# Altium PCB PCB2.PcbDoc
Units mm, origin at the board's own origin, x right, y up, seen from the top; angles counter-clockwise.
Board outline 67.18 x 97.54 mm, 2 copper layers (Top Layer, Bottom Layer); 14 components, 39 nets, 84 pads, 0 vias.
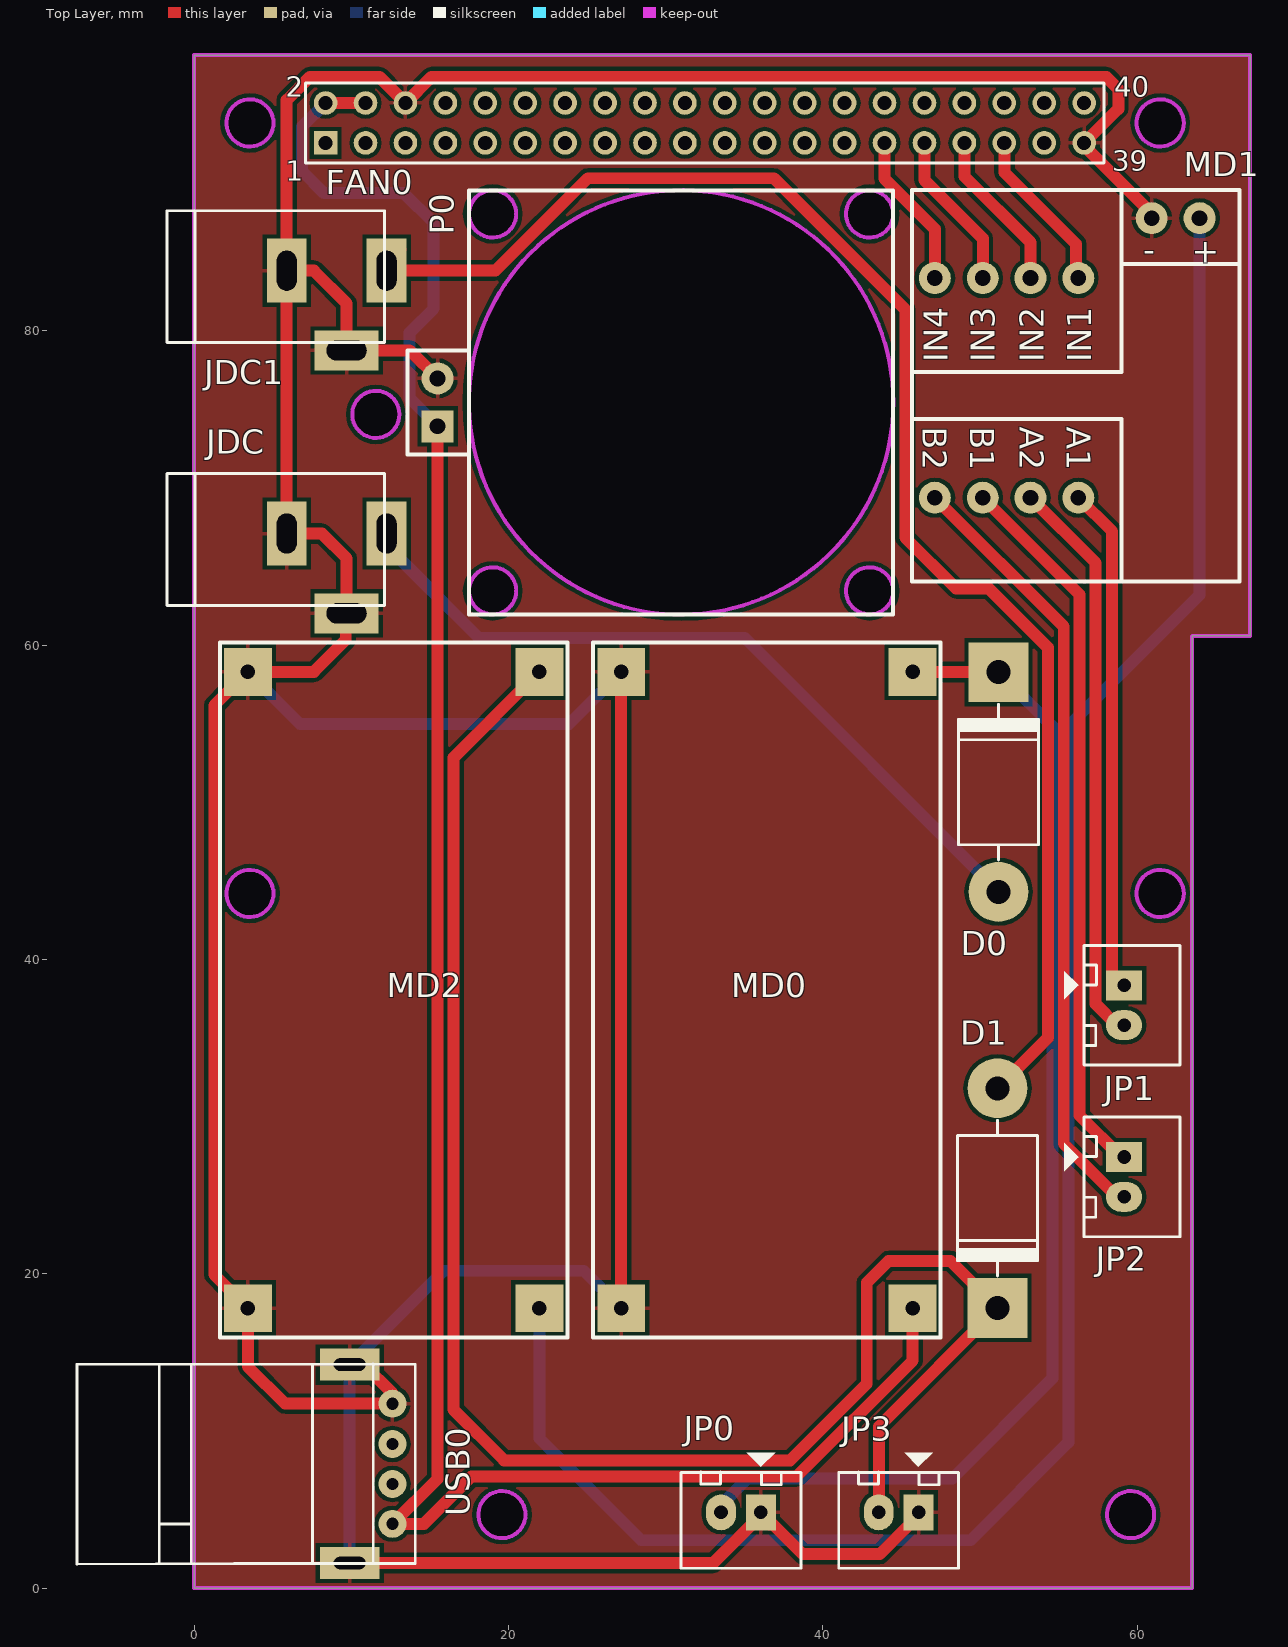
[diagram p0: Top Layer view]
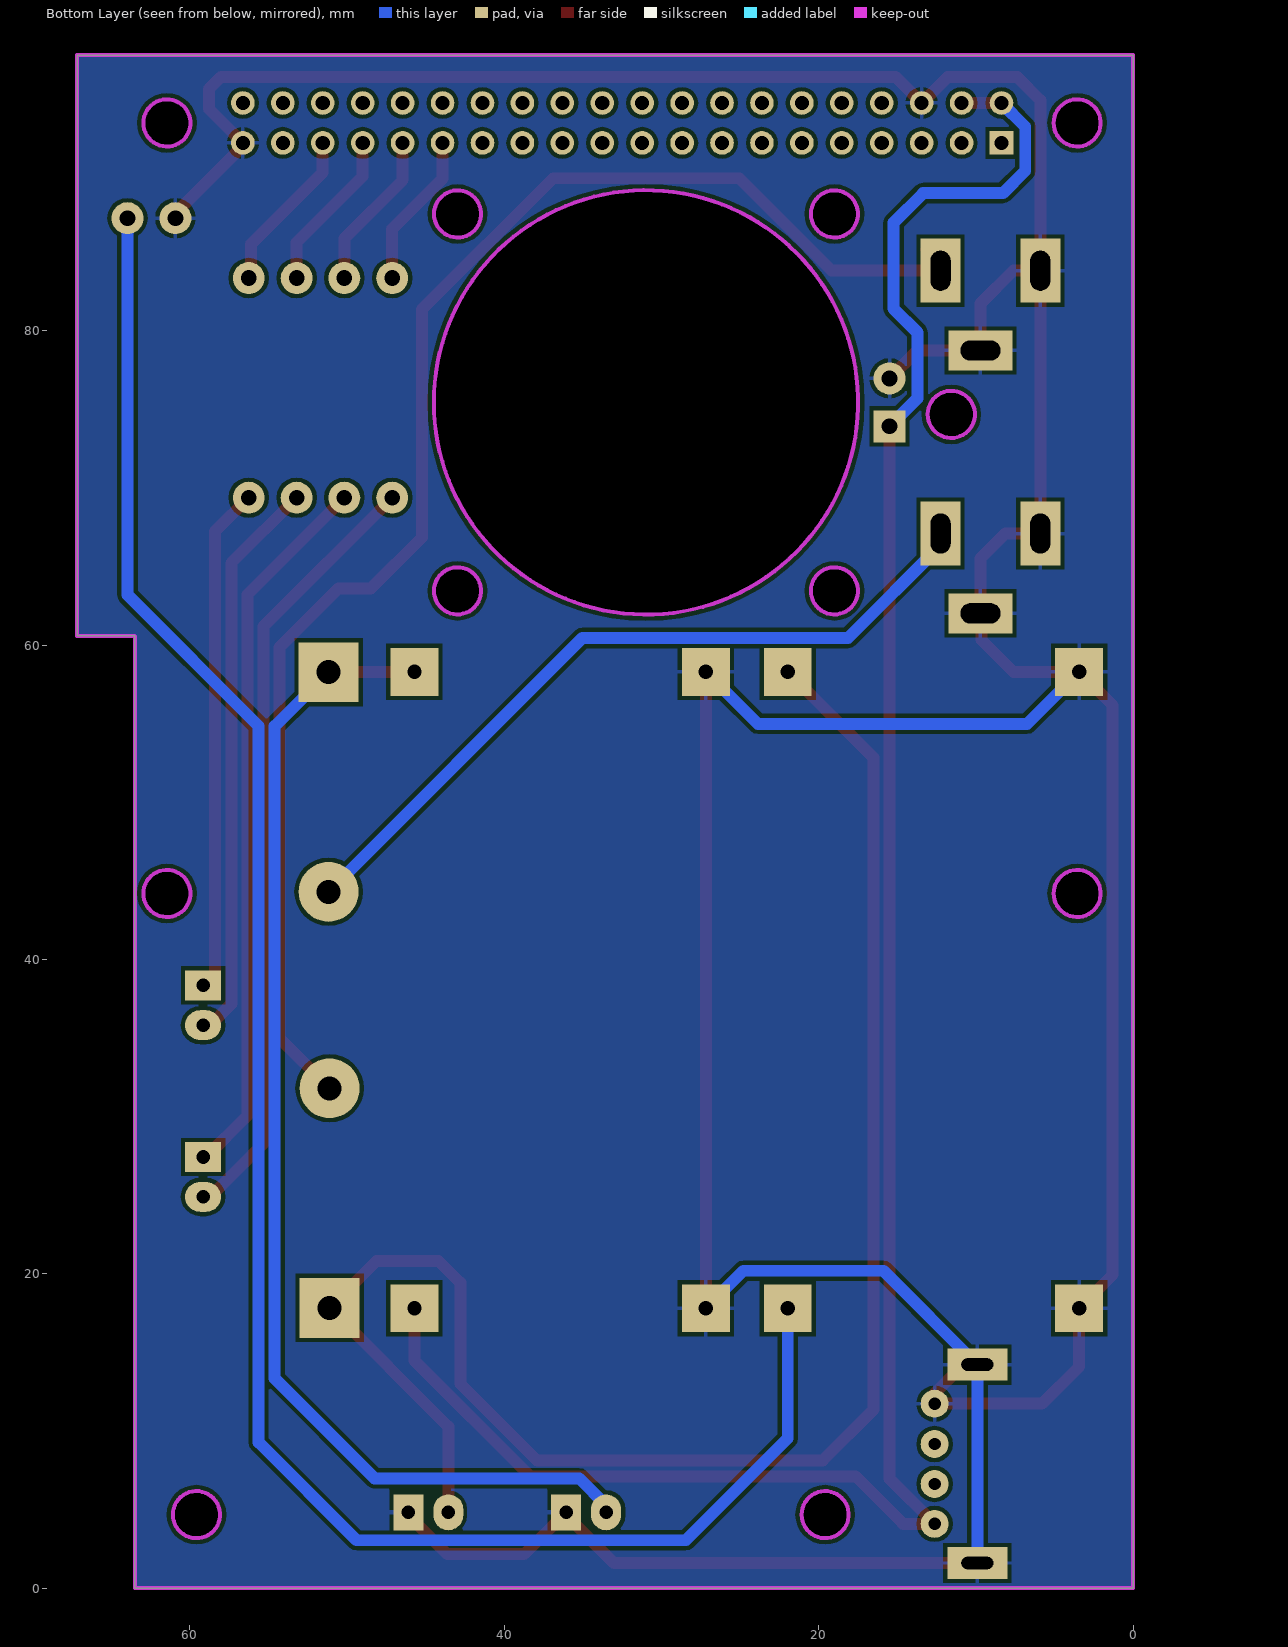
[diagram p1: Bottom Layer view, seen from below]
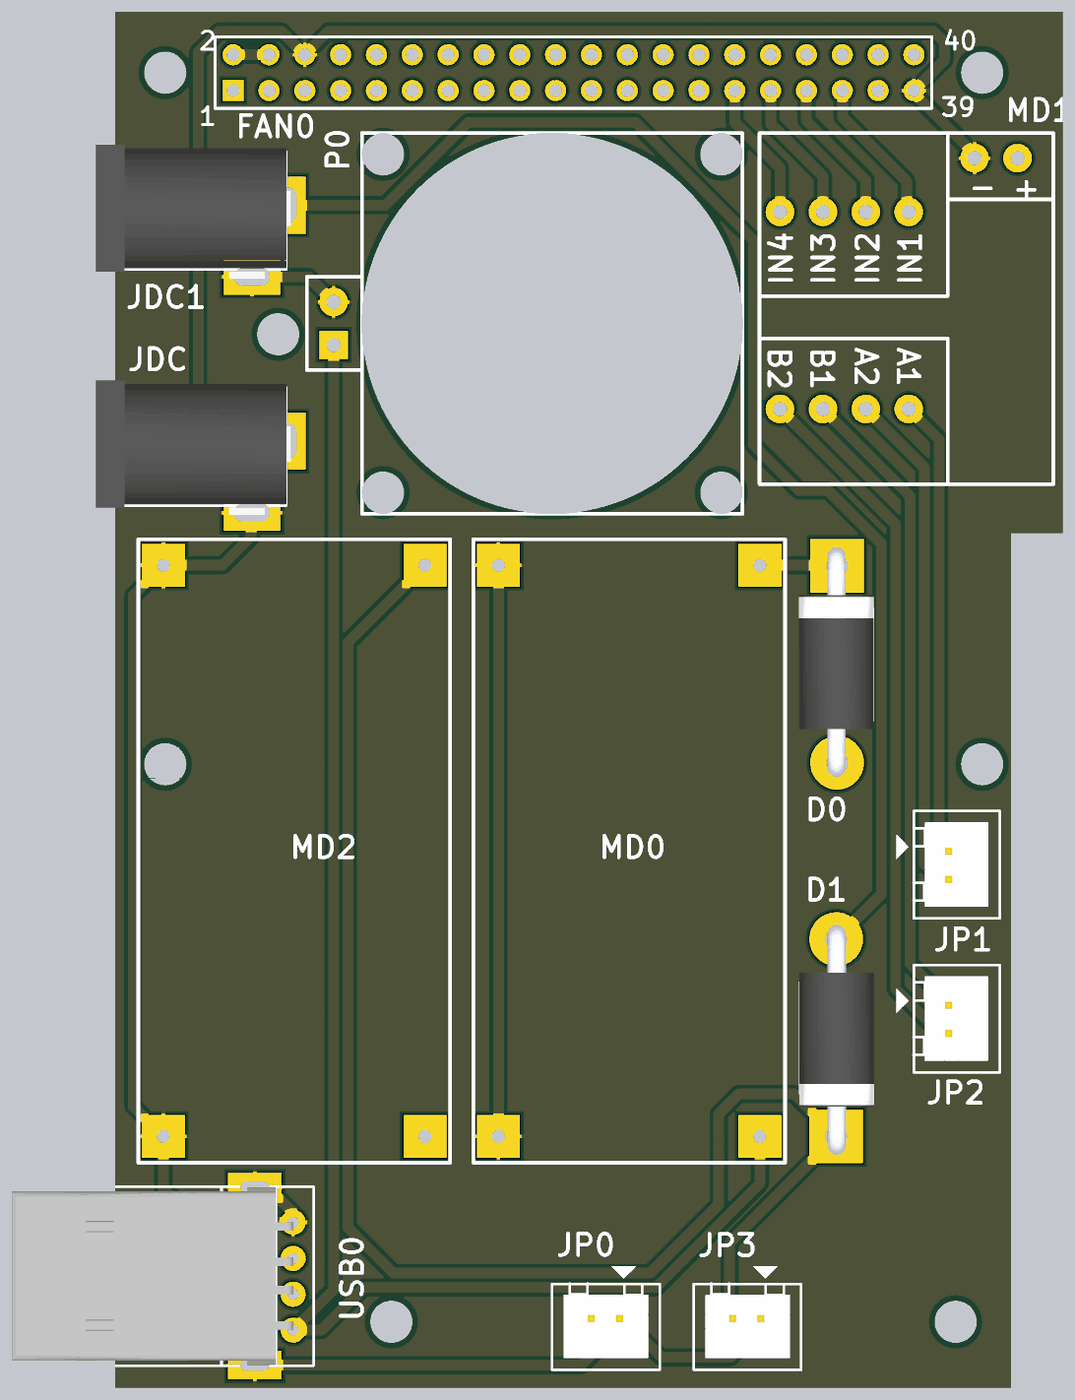
[diagram p2: 3D render of the assembled board from above, using the file's embedded part models]

## Layer stack, top to bottom
Top Solder: solder mask 0.0102, Solder Resist, Dk 3.5
Top Layer: signal copper 0.0356
Dielectric 1: dielectric 0.32, FR-4, Dk 4.8
Bottom Layer: signal copper 0.0356
Bottom Solder: solder mask 0.0102, Solder Resist, Dk 3.5

## Board outline
0,0 0,97.536 67.183,97.536 67.183,60.579 63.5,60.579 63.5,0
cut-out: 17.487,75.438 ccw(c30.987,75.438) 30.987,61.938 ccw(c30.987,75.438) 44.486,75.438 ccw(c30.987,75.438) 30.987,88.938 ccw(c30.987,75.438)
cut-out: 17.499,63.449 ccw(c18.999,63.449) 18.999,61.949 ccw(c18.999,63.449) 20.499,63.449 ccw(c18.999,63.449) 18.999,64.949 ccw(c18.999,63.449)
cut-out: 41.477,63.449 ccw(c42.977,63.449) 42.977,61.949 ccw(c42.977,63.449) 44.477,63.449 ccw(c42.977,63.449) 42.977,64.949 ccw(c42.977,63.449)
cut-out: 41.477,87.427 ccw(c42.977,87.427) 42.977,85.927 ccw(c42.977,87.427) 44.477,87.427 ccw(c42.977,87.427) 42.977,88.927 ccw(c42.977,87.427)
cut-out: 17.499,87.427 ccw(c18.999,87.427) 18.999,85.927 ccw(c18.999,87.427) 20.499,87.427 ccw(c18.999,87.427) 18.999,88.927 ccw(c18.999,87.427)
cut-out: 10.064,74.676 ccw(c11.564,74.676) 11.564,73.176 ccw(c11.564,74.676) 13.064,74.676 ccw(c11.564,74.676) 11.564,76.176 ccw(c11.564,74.676)
cut-out: 18.087,4.676 ccw(c19.587,4.676) 19.587,3.176 ccw(c19.587,4.676) 21.087,4.676 ccw(c19.587,4.676) 19.587,6.176 ccw(c19.587,4.676)
cut-out: 58.087,4.676 ccw(c59.587,4.676) 59.587,3.176 ccw(c59.587,4.676) 61.087,4.676 ccw(c59.587,4.676) 59.587,6.176 ccw(c59.587,4.676)
cut-out: 61.468,91.718 cw(c61.468,93.218) 59.968,93.218 cw(c61.468,93.218) 61.468,94.718 cw(c61.468,93.218) 62.968,93.218 cw(c61.468,93.218)
cut-out: 3.556,91.718 cw(c3.556,93.218) 2.056,93.218 cw(c3.556,93.218) 3.556,94.718 cw(c3.556,93.218) 5.056,93.218 cw(c3.556,93.218)
cut-out: 3.556,42.696 cw(c3.556,44.196) 2.056,44.196 cw(c3.556,44.196) 3.556,45.696 cw(c3.556,44.196) 5.056,44.196 cw(c3.556,44.196)
cut-out: 3.556,42.696 cw(c3.556,44.196) 2.056,44.196 cw(c3.556,44.196) 3.556,45.696 cw(c3.556,44.196) 5.056,44.196 cw(c3.556,44.196)
cut-out: 59.968,44.196 ccw(c61.468,44.196) 61.468,42.696 ccw(c61.468,44.196) 62.968,44.196 ccw(c61.468,44.196) 61.468,45.696 ccw(c61.468,44.196)

## Design rules (kind name [scope] priority, off if disabled: settings)
Clearance [All] p1: gap=0.254 ignorepadtopadclearanceinfootprint=FALSE except(0: Arc-Hole Track-Hole SMDPad-Hole THPad-Hole Via-Hole Fill-Hole Poly-Hole Region-Hole Text-Hole)
PolygonConnect [All] p1: connectstyle=Relief reliefconductorwidth=0.254 reliefentries=4 polygonreliefangle="90 Angle" airgapwidth=0.254
RoutingVias [All] p1: holewidth=0.711 width=1.27 viastyle="Through Hole" minholewidth=0.711 minwidth=1.27 maxholewidth=0.711 maxwidth=1.27
SolderMaskExpansion [All] p1: expansion=0.102
Width [All] p1: maxlimit=0.762 minlimit=0.254 preferedwidth=0.762
30 further rules are at their usual default settings.

## Components (designator, comment, footprint, x,y, rotation, side; value= is the part's Value field where it differs from the comment)
D0 "1N5408" D5A 51.181,58.272 r270 top
D1 "1N5408" D5A 51.117,17.831 r90 top
FAN0 "24*24mm" "FAN DC" 50.749,88.722 r180 top
JDC "Jac DC" DC-IN 9.073,64.556 r0 top
JDC1 "Jac DC" DC-IN 9.073,81.28 r0 top
JP0 "TEST BATTERY" CON2 36.068,4.826 r180 top value="Connector 2"
JP1 "MOTORA" CON2 59.167,38.354 r270 top value="Connector 2"
JP2 "MOTORb" CON2 59.167,27.432 r270 top value="Connector 2"
JP3 "TEST BATTERY" CON2 46.103,4.826 r180 top value="Connector 2"
MD0 "Adjust Voltage (5A)" XL4005 25.398,60.151 r270 top
MD1 "H BRIDGE MINI" "H BRIDGE MINI" 45.685,64.044 r0 top
MD2 "ADJ" LM2596-ADJ 1.649,60.151 r270 top
P0 "Header 20X2" HDR2X20 8.37,91.948 r0 top
USB0 "USB-S" USB-A 12.624,4.089 r90 top value=USB

## Footprints (in the part's own frame and the unit in brackets; to place one, negate y for a bottom-side part, rotate by r counter-clockwise, add the part's x,y. Pads: shape width x height; smd on the part's side, far side on the other; paste and mask are expansions set on the pad)
CON2 [mil] "CON2"
  rect 75x90 hole 34: 1(0,0)
  oval 75x90 hole 34: 2(100,0)
  silkscreen extent -100,-150 200,140, body extent -68,-70 168,107, height 236
D5A [mil] "Diode 5A, W 200mil, L 550mil"
  round 150 hole 60: 1(550,0)
  rect 150x150 hole 60: 2(0,0)
  silkscreen extent 80,-100 470,100, body extent -52,-106 590,103, height 254
DC-IN [mil] "Jac DC input"
  rect 100x160 hole 50 slot 100 at 90 deg: 1(125,100) 2(-125,100)
  rect 160x100 hole 50 slot 100 at 0 deg: 3(25,-100)
  silkscreen extent -425,-80 120,250, body extent -410,-105 134,269, height 434
"FAN DC" [mil] "24*24mm"
  round 80 hole 39.37: GND(1388,463)
  rect 80x80 hole 39.37: VCC(1388,583)
  Keep-Out Layer circle w10: c778,523 r531.43
  Keep-Out Layer circle w10: c1250,51 r59.06
  Keep-Out Layer circle w10: c306,51 r59.06
  Keep-Out Layer circle w10: c306,995 r59.06
  Keep-Out Layer circle w10: c1250,995 r59.06
  silkscreen extent 120,-8 1463,1054
"H BRIDGE MINI" [mil] "MX1508"
  round 80 hole 39.37: 0(720,910) 1(600,910) 2(416.37,760) 3(296.37,760) 4(177,760) 5(57,760) 6(416.37,210) 7(296.37,210) 8(177,210) 9(57,210)
  silkscreen extent 0,0 820,980
HDR2X20 [mm] "Connector; Header; 20x2 Position"
  rect 1.5x1.5 hole 0.9: 1(0,0)
  round 1.5 hole 0.9: 2(0,2.54) 3(2.54,0) 4(2.54,2.54) 5(5.08,0) 6(5.08,2.54) 7(7.62,0) 8(7.62,2.54) 9(10.16,0) 10(10.16,2.54) 11(12.7,0) 12(12.7,2.54) 13(15.24,0) 14(15.24,2.54) 15(17.78,0) 16(17.78,2.54) 17(20.32,0) 18(20.32,2.54) 19(22.86,0) 20(22.86,2.54) 21(25.4,0) 22(25.4,2.54) 23(27.94,0) 24(27.94,2.54) 25(30.48,0) 26(30.48,2.54) 27(33.02,0) 28(33.02,2.54) 29(35.56,0) 30(35.56,2.54) 31(38.1,0) 32(38.1,2.54) 33(40.64,0) 34(40.64,2.54) 35(43.18,0) 36(43.18,2.54) 37(45.72,0) 38(45.72,2.54) 39(48.26,0) 40(48.26,2.54)
  silkscreen extent -1.27,-1.27 49.53,3.81
LM2596-ADJ [mil] "Module"
  rect 120x120 hole 35.98: 0(73,800) 1(73,70.08) 2(1667,800) 3(1667,70.08)
  silkscreen extent 0,0 1740,870
USB-A [mil]
  round 70 hole 31: 1(0,0) 2(100,0) 3(200,0) 4(301,0)
  rect 80x150 hole 31 slot 80 at 90 deg: 5(-98,107) 6(399,107)
  silkscreen extent -101,-57 401,790, body extent -97,0 399,784, height 177
XL4005 [mil] "Adjust Voltage (5A)"
  rect 120x120 hole 35.98: 0(73,800) 1(73,70.08) 2(1667,800) 3(1667,70.08)
  silkscreen extent 0,0 1740,870

## Part data
D0 D1: library part D5A, "Diode 5A"
FAN0: library part "FAN 24*24mm"
JDC JDC1: library part DCIN, "Jac DC input"
JP0 JP1 JP2 JP3: library part Con2, "Connector 2"
MD0: library part XL4005
MD1: "MX1508"
MD2: library part LM2596, "Manage voltage"
P0: "Header, 20-Pin, Dual row", LatestRevisionDate=17-Jul-2002, LatestRevisionNote="Re-released for DXP Platform.", Publisher="Altium Limited"
USB0: library part USB_S, "USB connector"

## Nets (pads, with @x,y where several pads share a name; then routed paths per layer and width w, separated by ;. In a path a pad name is that pad's centre, name@x,y a point inside that pad or via, vN(x,y) a via of type N, cw(c..) or ccw(c..) an arc to the next point about the centre after c; other vN are vias at no path point)
+12: D0.2 JP0.2 MD0.0 | length 76.7
  Top Layer w0.762: MD0.0 51.156,58.297 D0.2
  Bottom Layer w0.762: JP0.2 33.528,5.28 35.233,6.985 48.26,6.985 54.61,13.335 54.61,54.843 D0.2
+12_1: D1.2 JP3.2 MD2.0 | length 111.6
  Top Layer w0.762: MD2.0 16.51,52.838 16.51,11.353 19.735,8.128 37.931,8.128 42.799,12.996 42.799,19.431 44.196,20.828 48.12,20.828 D1.2 43.563,10.276 JP3.2
GND: FAN0.GND JDC1.2 JDC1.3 JDC.2 JDC.3 JP0.1 JP3.1 MD0.1 MD0.3 MD1.1 MD2.1 MD2.3 P0.6 P0.39 USB0.4 USB0.5 USB0.6 | length 325.1
  Top Layer w0.762: USB0.5 33.033,1.6 JP0.1@36.068,4.635 ; USB0.6 10.795,14.224 12.624,12.395 USB0.4 5.791,11.735 3.429,14.097 MD2.3 1.294,19.944 1.294,56.162 MD2.1 7.62,58.297 9.652,60.329 9.652,61.96 JDC.3 9.708,65.516 8.128,67.096 JDC.2 JDC1.2 ; FAN0.GND 13.716,78.74 JDC1.3 9.708,81.732 7.62,83.82 JDC1.2 ; MD0.3 MD0.1 ; JP0.1 JP0.1@36.068,4.635 ; JP3.1 46.103,4.635 43.626,2.159 38.735,2.159 36.83,4.064 36.639,4.064 JP0.1@36.068,4.635 ; MD1.1 60.925,87.453 56.63,91.748 P0.39 58.801,94.119 58.801,95.377 58.039,96.139 15.101,96.139 P0.6 11.799,96.139 7.366,96.139 5.898,94.671 JDC1.2
  Bottom Layer w0.762: MD2.1 6.735,54.991 23.872,54.991 MD0.1 ; USB0.5 USB0.6 15.875,20.193 24.794,20.193 MD0.3
GPIO02: P0.3
GPIO03: P0.5
GPIO04: P0.7
GPIO05: MD1.5 P0.29 | length 9.9
  Top Layer w0.762: P0.29 43.93,89.673 47.133,86.47 MD1.5
GPIO06: MD1.4 P0.31 | length 10.1
  Top Layer w0.762: P0.31 46.47,89.576 50.181,85.865 MD1.4
GPIO07: P0.26
GPIO08: P0.24
GPIO09: P0.21
GPIO10: P0.19
GPIO11: P0.23
GPIO12: P0.32
GPIO13: MD1.3 P0.33 | length 10.3
  Top Layer w0.762: P0.33 49.01,89.822 53.213,85.619 MD1.3
GPIO14: P0.8
GPIO15: P0.10
GPIO16: P0.36
GPIO17: P0.11
GPIO18: P0.12
GPIO19: MD1.2 P0.35 | length 10.6
  Top Layer w0.762: P0.35 51.571,91.927 51.571,90.055 56.118,85.507 56.118,83.491 MD1.2
GPIO20: P0.38
GPIO21: P0.40
GPIO22: P0.15
GPIO23: P0.16
GPIO24: P0.18
GPIO25: P0.22
GPIO26: P0.37
GPIO27: P0.13
ID_SC: P0.28
ID_SD: P0.27
NetD0_1: D0.1 JDC.1 | length 48.8
  Bottom Layer w0.762: JDC.1 12.248,66.334 18.125,60.456 35.027,60.456 D0.1
NetD1_1: D1.1 JDC1.1 | length 96.4
  Top Layer w0.762: JDC1.1@13.137,85.165 12.248,84.276 JDC1.1 19.171,83.82 25.049,89.698 36.895,89.698 45.248,81.345 45.248,66.838 48.49,63.597 50.564,63.597 54.316,59.845 54.316,34.999 D1.1
NetJP1_1: JP1.1 MD1.6 | length 32.3
  Top Layer w0.762: MD1.6 58.405,67.234 58.405,38.925 58.977,38.354 JP1.1
NetJP1_2: JP1.2 MD1.7 | length 36.3
  Top Layer w0.762: MD1.7 57.364,65.227 57.364,37.164 58.714,35.814 JP1.2
NetJP2_1: JP2.1 MD1.8 | length 45.8
  Top Layer w0.762: MD1.8 56.348,63.211 56.348,30.061 58.977,27.432 JP2.1
NetJP2_2: JP2.2 MD1.9 | length 49.7
  Top Layer w0.762: MD1.9 55.332,61.179 55.332,28.274 58.714,24.892 JP2.2
VCC: FAN0.VCC MD0.2 P0.2 P0.4 USB0.1 | length 143.3
  Top Layer w0.762: P0.2 P0.4 ; FAN0.VCC 15.494,6.96 USB0.1 14.63,4.089 17.653,7.112 38.352,7.112 45.718,14.478 MD0.2
  Bottom Layer w0.762: P0.2 6.858,92.976 6.858,90.17 8.272,88.756 13.352,88.756 15.24,86.868 15.24,81.407 13.716,79.883 13.716,75.692 FAN0.VCC
VCC_1: MD1.0 MD2.2 | length 128.5
  Bottom Layer w0.762: MD2.2 21.969,9.527 28.448,3.048 49.403,3.048 55.626,9.271 55.626,54.841 63.973,63.188 MD1.0
pads on no net: P0.1 P0.9 P0.14 P0.17 P0.20 P0.25 P0.30 P0.34 USB0.2 USB0.3

## Polygon pours and split planes (outlines as drawn)
GND on Bottom Layer "Bottom Layer-GND 1" (solid, pour order 48): 0,97.536 67.183,97.536 67.183,60.579 63.509,60.579 63.5,60.57 63.5,0 0,0
GND on Bottom Layer "Bottom Layer-GND" (solid, pour order 38): 71.374,96.774
GND on Top Layer "Top Layer-GND" (solid, pour order 46): 0,97.536 67.183,97.536 67.183,60.579 63.491,60.579 63.5,60.57 63.5,0 0,0

## Keep-outs
Keep-Out Layer:
  circle w0.254: c18.999,63.449 r1.5
  circle w0.254: c42.977,63.449 r1.5
  circle w0.254: c42.977,87.427 r1.5
  circle w0.254: c18.999,87.427 r1.5
  circle w0.254: c11.564,74.676 r1.5
  circle w0.254: c19.587,4.676 r1.5
  circle w0.254: c59.587,4.676 r1.5
  circle w0.254: c61.468,93.218 r1.5
  circle w0.254: c3.556,93.218 r1.5
  circle w0.254: c3.556,44.196 r1.5
  circle w0.254: c61.468,44.196 r1.5
  lines w0.254: 0,0 0,97.536 67.183,97.536 67.183,60.579 67.174,60.57 63.519,60.57 63.5,60.551 63.5,0 0,0

## Text inside footprints (layer, text, board x,y; h text height)
MD1: Top Overlay "B2" at 46.371,73.9 h1.52 r270; Top Overlay "B1" at 49.394,73.9 h1.52 r270; Top Overlay "A2" at 52.518,73.9 h1.52 r270; Top Overlay "A1" at 55.515,73.9 h1.52 r270; Top Overlay "IN4" at 47.946,77.989 h1.52 r90; Top Overlay "IN3" at 50.943,77.989 h1.52 r90; Top Overlay "IN2" at 54.067,77.989 h1.52 r90; Top Overlay "IN1" at 57.09,77.989 h1.52 r90; Top Overlay "-" at 60.392,84.415 h1.52; Top Overlay "+" at 63.491,84.314 h1.52
P0: Top Overlay "39" at 58.42,90.17 h1.27; Top Overlay "40" at 58.547,94.869 h1.27; Top Overlay "2" at 5.83,94.869 h1.27; Top Overlay "1" at 5.83,89.535 h1.27